# Altium PCB PCB_GUNVS.PcbDoc
Units mm, origin at the board's own origin, x right, y up, seen from the top; angles counter-clockwise.
Board outline 14.5 x 13.7 mm, 2 copper layers (Top Layer, Bottom Layer); 21 components, 12 nets, 77 pads, 0 vias.
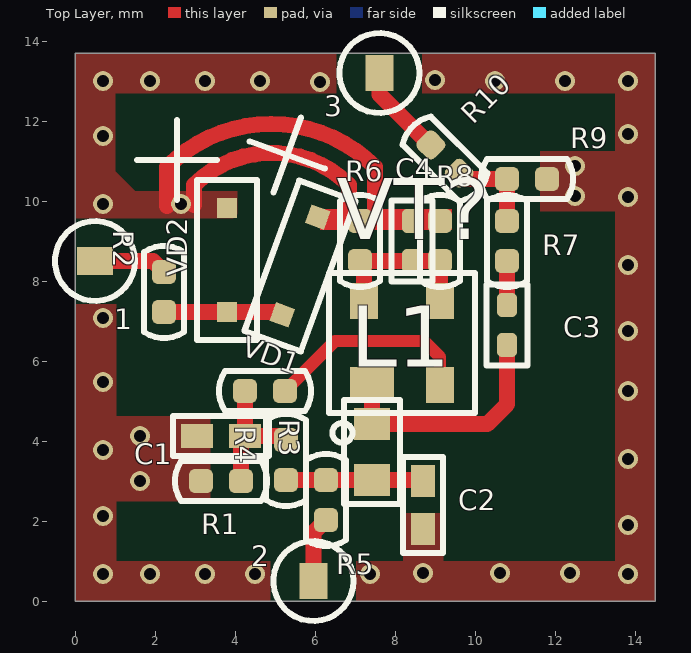
[diagram p0: Top Layer view]
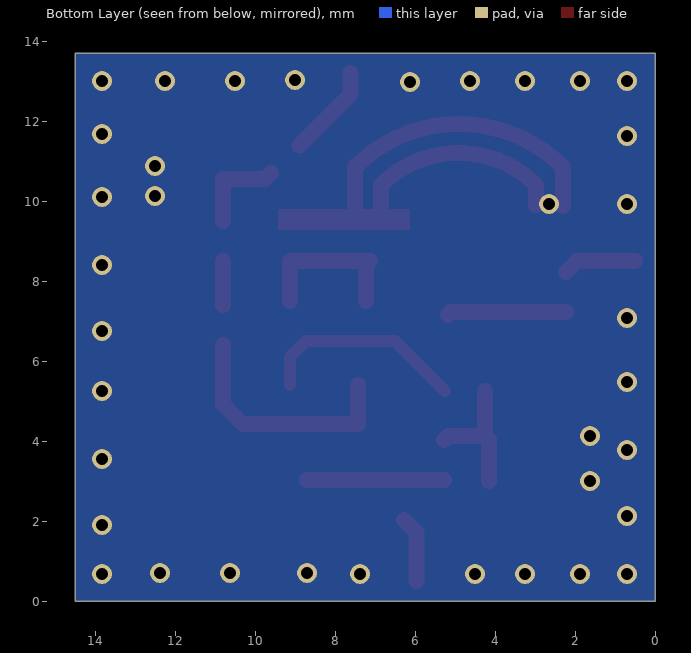
[diagram p1: Bottom Layer view, seen from below]

## Layer stack, top to bottom
Top Solder: solder mask 0.0102, Solder Resist, Dk 3.5
Top Layer: signal copper 0.0356
Dielectric 1: dielectric 0.32, FR-4, Dk 4.8
Bottom Layer: signal copper 0.0356
Bottom Solder: solder mask 0.0102, Solder Resist, Dk 3.5

## Board outline
0,0 0,13.7 14.5,13.7 14.5,0

## Design rules (kind name [scope] priority, off if disabled: settings)
Clearance [All] p1: gap=0.254 ignorepadtopadclearanceinfootprint=TRUE except(0: Arc-Hole Track-Hole SMDPad-Hole THPad-Hole Via-Hole Fill-Hole Poly-Hole Region-Hole Text-Hole)
PlaneConnect [All] p1: planeconnectstyle=Direct reliefexpansion=0.508 reliefentries=4 reliefconductorwidth=0.254 reliefairgap=0.254
PolygonConnect [All] p1: connectstyle=Direct reliefconductorwidth=0.254 reliefentries=4 polygonreliefangle="90 Angle" airgapwidth=0.254
RoutingVias [All] p1: holewidth=0.711 width=1.27 viastyle="Through Hole" minholewidth=0.711 minwidth=1.27 maxholewidth=0.711 maxwidth=1.27
ShortCircuit [All] p1: allowed=TRUE
SolderMaskExpansion [All] p1: expansion=0.102
Width [All] p1: maxlimit=0.5 minlimit=0.254 preferedwidth=0.3 minimp=50.000000 maximp=50.000000 favimp=50.000000
28 further rules are at their usual default settings.

## Components (designator, comment, footprint, x,y, rotation, side; value= is the part's Value field where it differs from the comment)
1 "TP" TP1#1 0.5,8.5 r90 top
2 "TP" TP1#2 5.96,0.5 r90 top
3 "TP" TP1#2 7.61,13.2 r90 top
C1 "100" CAPC1005N 3.65,4.125 r180 top value={Value}
C2 "1000" CAPC1005N 8.7,2.4 r270 top value={Value}
C3 "100" CAPC1005L 10.8,6.9 r270 top value={Value}
C4 "5,6" CAPC1005L 8.425,9 r270 top value={Value}
L1 "43" INDC1608L 7.425,3.725 r90 top
R1 "2,7 к" RESC1005L 3.65,3 r180 top value={Value}
R2 "2,7 к" RESC1005L 2.225,7.725 r90 top value={Value}
R3 "510" RESC1005L 4.75,5.25 r0 top value={Value}
R4 "2,7 к" RESC1005L 5.275,3.525 r90 top value={Value}
R5 "68" RESC1005L 6.275,2.525 r90 top value={Value}
R6 "510" RESC1005L 7.125,9 r90 top value={Value}
R7 "11" RESC1005L 10.8,9 r270 top value={Value}
R8 "510" RESC1005L 9.125,9 r90 top value={Value}
R9 "100" RESC1005L 11.3,10.55 r0 top value={Value}
R10 "11" RESC1005L 9.25,11.05 r315 top value={Value}
VD1 "BB149" SOD2512X100N 5.625,8.375 r70 top
VD2 "BB149" SOD2512X100N 3.8,8.525 r90 top
VT? "" SOT143B 7.425,5.4 r0 top

## Footprints (in the part's own frame and the unit in brackets; to place one, negate y for a bottom-side part, rotate by r counter-clockwise, add the part's x,y. Pads: shape width x height; smd on the part's side, far side on the other; paste and mask are expansions set on the pad)
CAPC1005L [mm] "Chip Capacitor, Body 1.0x0.5mm, IPC High Density"
  rrect50% 0.6x0.5 smd: 1(-0.5,0) 2(0.5,0)
  Top Layer pour cut-out: -0.2,0.5 -0.2,-0.5 0.2,-0.5 0.2,0.5
  silkscreen extent -1.02,-0.51 1.02,0.51, body extent -0.55,-0.3 0.55,0.3, height 0.6
CAPC1005N [mm] "Chip Capacitor, Body 1.0x0.5mm, IPC Medium Density"
  rect 0.8x0.6 smd: 1(-0.6,0) 2(0.6,0)
  Top Layer pour cut-out: -0.2,0.5 -0.2,-0.5 0.2,-0.5 0.2,0.5
  silkscreen extent -1.2,-0.5 1.2,0.5, body extent -0.55,-0.3 0.55,0.3, height 0.6
INDC1608L [mm] "Chip Inductor, Body 1.6x0.8mm, IPC High Density"
  rect 0.8x0.9 smd: 1(-0.7,0) 2(0.7,0)
  Top Layer pour cut-out: -0.3,0.7 -0.3,-0.7 0.3,-0.7 0.3,0.7
  silkscreen extent -1.3,-0.7 1.3,0.7, body extent -0.87,-0.48 0.87,0.48, height 0.71
RESC1005L [mm] "Chip Resistor, Body 1.1x0.5mm, IPC High Density"
  rrect50% 0.6x0.6 smd: 1(-0.5,0) 2(0.5,0)
  Top Layer pour cut-out: -0.2,0.5 -0.2,-0.5 0.2,-0.5 0.2,0.5
  silkscreen extent -1.15,-0.5 1.15,0.5, body extent -0.55,-0.3 0.55,0.3, height 0.4
SOD2512X100N [mm] "SOD Diode; 1.8mm W X 1.35mm L X 1.00mm H Body"
  rect 0.5x0.5 smd: 1(-1.3,0) 2(1.3,0)
  silkscreen extent -2,-0.75 3.5,2.25, body extent -1.25,-0.62 1.25,0.63, height 0.96
SOT143B [mm]
  rect 1.1x0.9 smd: 1(0,0)
  rect 0.7x0.9 smd: 2(1.7,0) 3(1.7,2.1) 4(-0.2,2.1)
  silkscreen extent -1.07,-1.44 2.58,2.8
TP1#1 [mm] "Test point 1x1.6"
  rect 0.7x0.9 smd: 1(0,0)
  silkscreen extent -1,-1 1,1
TP1#2 [mm] "Test point 1x1.6"
  rect 0.9x0.7 smd: 1(0,0)
  silkscreen extent -1,-1 1,1

## Part data
1 2 3: "Test point"
C1 C2 C3 C4: library part C0402, "Чип-конденсатор", Power/Voltage={Voltage}, Tolerance={Tolerance}, Name=0402, TKE/TKC={TKE/TKC}, Type=Конденсатор
L1: library part L0603, "Индуктивность без магнитопровода", Tolerance={Tolerance}, Name=0603, Type=Индуктивность
R1 R2 R3 R4 R5 R6 R7 R8 R9 R10: library part R0402, "Чип-резистор", Tolerance={Tolerance}, Name=0402, Type=Резистор
VD1 VD2: "UHF variable capacitance diode", Manufacturer=NXP, ManufacturerPartNumber=BB149A, Package="SC-76 (SOD323)", SymAuthor="Юдин Д.Г.", Type=Диод
VT?: library part BFG67, "Кремниевый биполярный 8 ГГц широкополосный n-p-n транзистор.", Manufacturer=NXP, Package=SOT143B, ManufacturerPartNumber=BFG67, Type=Транзистор

## Free pads (board coordinates)
  round 0.5 hole 0.3 paste+0: 2(2.65,9.925) 3(0.7,0.675) 3(1.875,0.675) 3(3.25,0.675) 4(4.5,0.675) 5(7.375,0.675) 6(8.7,0.7) 7(10.625,0.7) 8(13.825,0.675) 9(12.375,0.7) 10(13.825,13) 11(0.7,13) 11(12.5,10.125) 11(12.5,10.875) 11(13.825,11.675) 12(0.7,3.775) 12(0.7,9.925) 12(1.625,3) 12(1.625,4.125) 12(13.825,3.55) 12(13.825,8.4) 13(0.7,2.125) 13(0.7,7.075) 13(13.825,1.9) 13(13.825,6.75) 14(6.125,12.975) 15(9,13.025) 16(0.7,5.475) 16(0.7,11.625) 16(13.825,5.25) 16(13.825,10.1) 17(1.875,13) 18(3.25,13) 19(4.625,13) 20(10.5,13) 21(12.25,13)

## Nets (pads, with @x,y where several pads share a name; then routed paths per layer and width w, separated by ;. In a path a pad name is that pad's centre, name@x,y a point inside that pad or via, vN(x,y) a via of type N, cw(c..) or ccw(c..) an arc to the next point about the centre after c; other vN are vias at no path point)
GND: C1.2 C2.2 C4.1 pad.2 pad.3 pad.4 pad.5 pad.6 pad.7 pad.8 pad.9 pad.10 pad.11 pad.12 pad.13 pad.14 pad.15 pad.16 pad.17 pad.18 pad.19 pad.20 pad.21 R1.2 R6.2 R8.2 R9.2 VD1.2 VD2.2 | length 13.4
  Top Layer w0.4: 2.3,9.875 2.3,10.85 cw(c4.9,8.25) 7.5,10.85 7.5,9.6 ; 2.975,9.9 2.975,10.4 cw(c4.912,8.463) 6.85,10.4 6.85,9.775
Net1_1: 1.1 R2.2 | length 1.8
  Top Layer w0.4: 1.1 1.95,8.5 R2.2
Net2_1: 2.1 R5.1 | length 1.7
  Top Layer w0.4: 2.1 5.96,1.71 R5.1
Net3_1: 3.1 R10.1 | length 2.3
  Top Layer w0.4: 3.1 7.61,12.665 R10.1@8.884,11.391
NetC1_1: C1.1 R1.1 R3.1 R4.2 | length 3.4
  Top Layer w0.4: R1.1 4.15,4.025 C1.1 ; R3.1 C1.1 ; R4.2 5.175,4.125 C1.1
NetC2_1: C2.1 L1.1 R4.1 R5.2 | length 3.4
  Top Layer w0.4: R4.1 R5.2 L1.1 C2.1@8.7,3.025
NetC3_1: C3.1 R7.2 | length 1.1
  Top Layer w0.4: C3.1 R7.2
NetC3_2: C3.2 L1.2 VT?.1 | length 6
  Top Layer w0.4: VT?.1 L1.2 10.3,4.425 10.8,4.925 C3.2
NetC4_2: C4.2 R6.1 R8.1 VT?.3 VT?.4 | length 4
  Top Layer w0.4: VT?.4 7.225,8.4 R6.1 8.125,8.5 R8.1 VT?.3
NetR2_1: R2.1 VD1.1 VD2.1 | length 3
  Top Layer w0.4: R2.1 VD2.1 5.109,7.225 VD1.1
NetR3_2: R3.2 VT?.2 | length 5.3
  Top Layer w0.3: R3.2 6.5,6.5 8.725,6.5 9.125,6.1 VT?.2
NetR7_1: R7.1 R9.1 R10.2 | length 2.3
  Top Layer w0.4: R10.2 9.75,10.55 R9.1 R7.1

## Polygon pours and split planes (outlines as drawn)
GND on Top Layer "GND Layer" (solid, pour order 6): 0,13.7 6.525,13.7 6.525,12.7 1,12.7 1,9.575 0,9.575
GND on Top Layer "GND Layer" (solid, pour order 22): 4.05,10.25 1.5,10.25 1,10.75 0.75,10.75 0.75,9.575 4.05,9.575
GND on Top Layer "GND Layer" (solid, pour order 8): 0,7.425 1.025,7.425 1.025,1 4.875,1 4.875,0 0,0
GND on Top Layer "GND Layer" (solid, pour order 18): 3.375,4.625 3.375,2.5 0.875,2.5 0.875,4.625
GND on Top Layer "GND Layer" (solid, pour order 10): 8.675,13.7 8.675,12.7 13.5,12.7 13.5,1 7.025,1 7.025,0 14.5,0 14.5,13.7
GND on Top Layer "GND Layer" (solid, pour order 16): 11.625,11.25 11.625,9.75 13.625,9.75 13.625,11.25
GND on Top Layer "GND Layer" (solid, pour order 20): 8.2,2.2 9.2,2.2 9.2,0.575 8.2,0.575
GND on Bottom Layer "GND Layer" (solid, pour order 12): 0,13.7 0,0 14.5,0 14.5,13.7

## Other copper
Top Layer:
  rectangle net GND: 6.125,9.275 9.425,9.8

## Silkscreen, mask and mechanical layers (free items; w line width, h text height)
Mechanical 1:
  the board outline again, w0.3